# EAGLE board board (EAGLE 9.7.0)
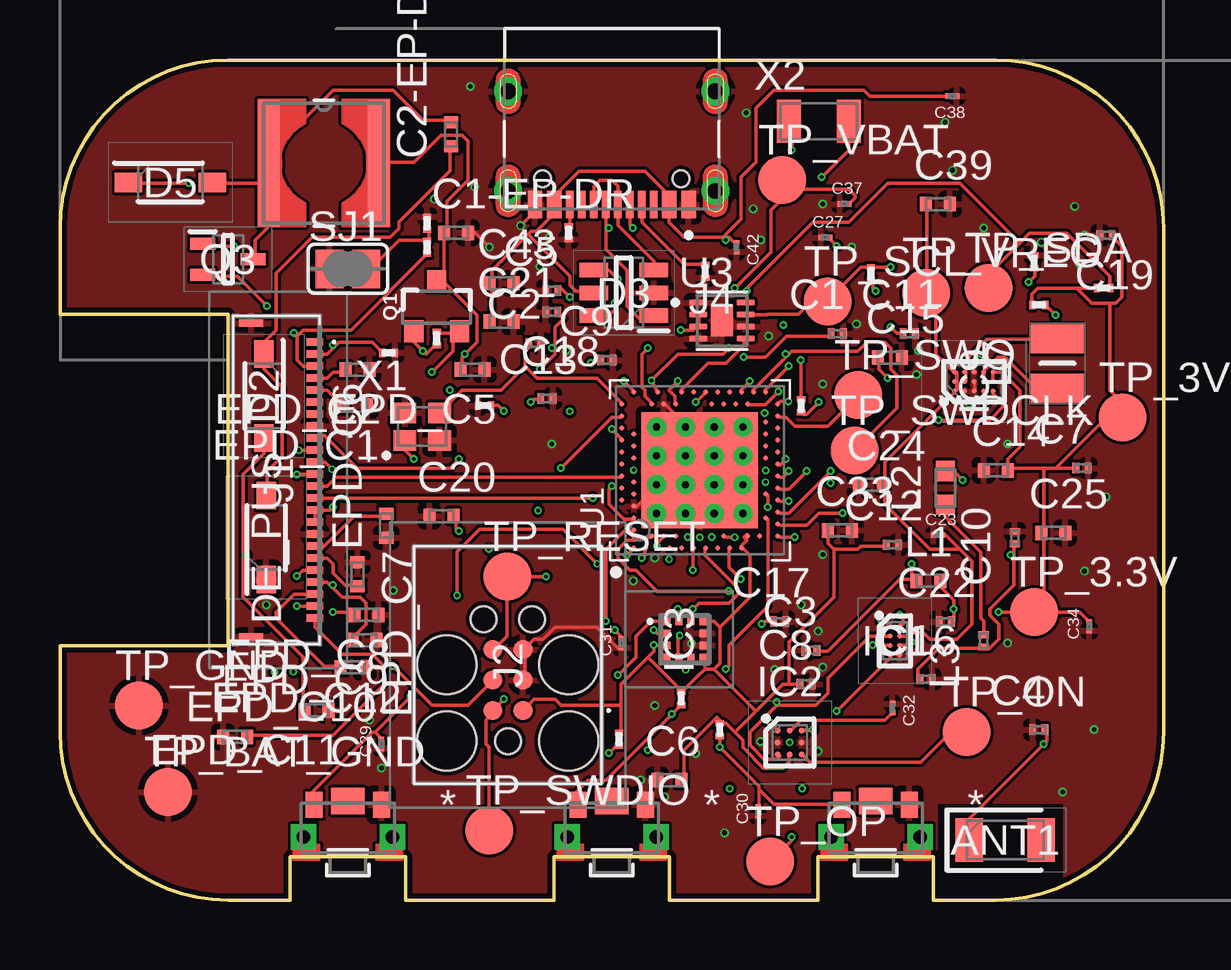
[diagram p0: board, top side]
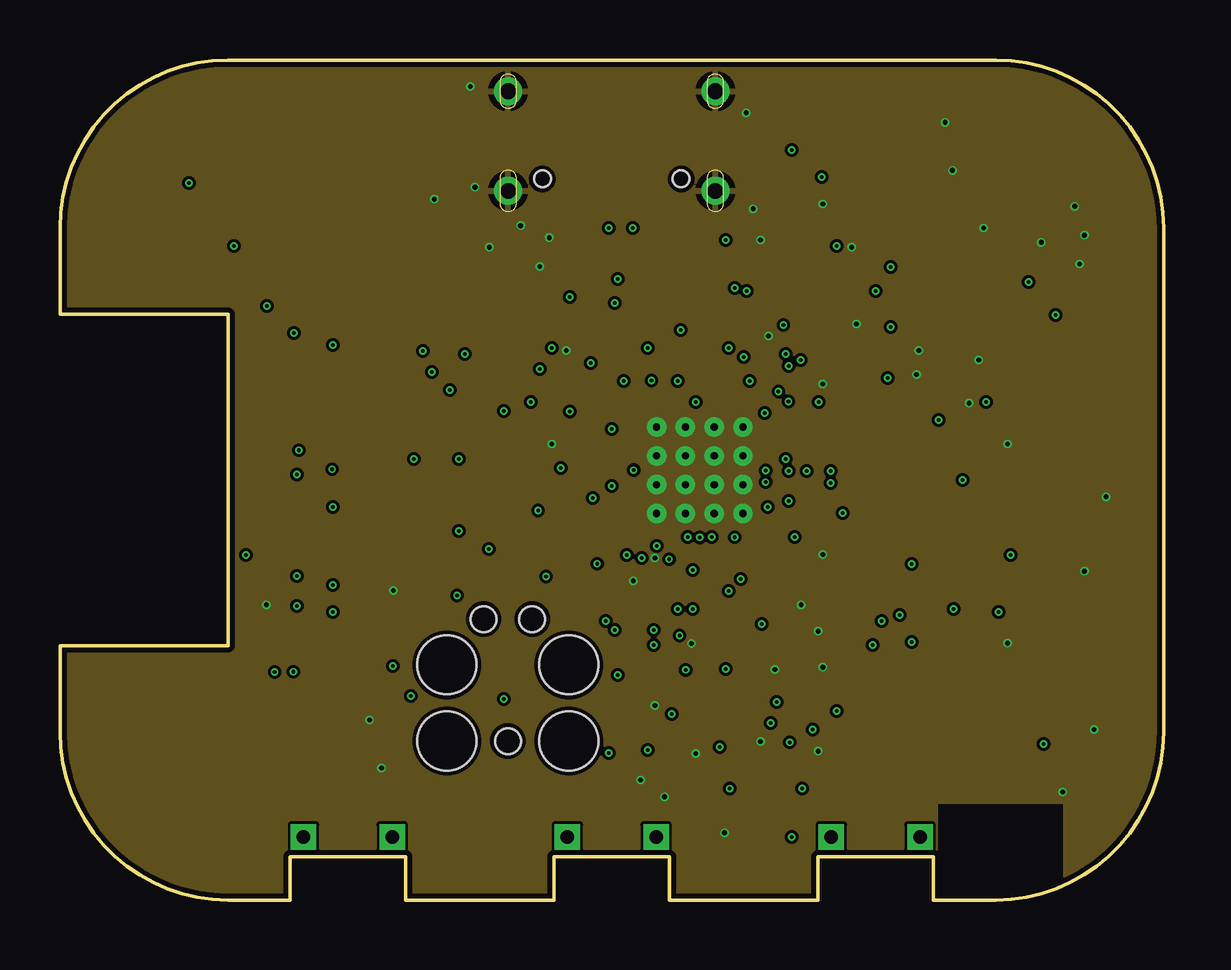
[diagram p1: board, inner layer Route2]
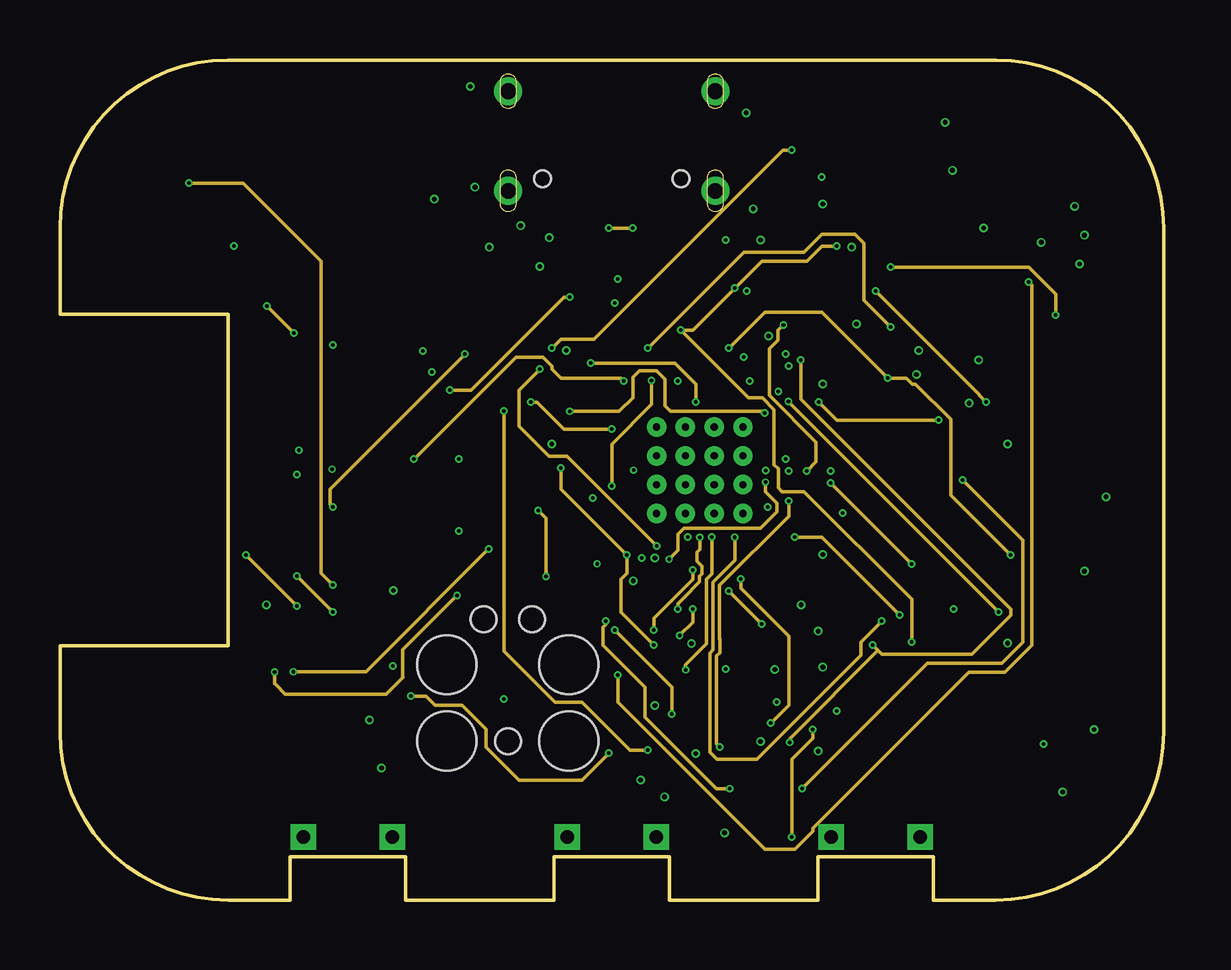
[diagram p2: board, inner layer Route15]
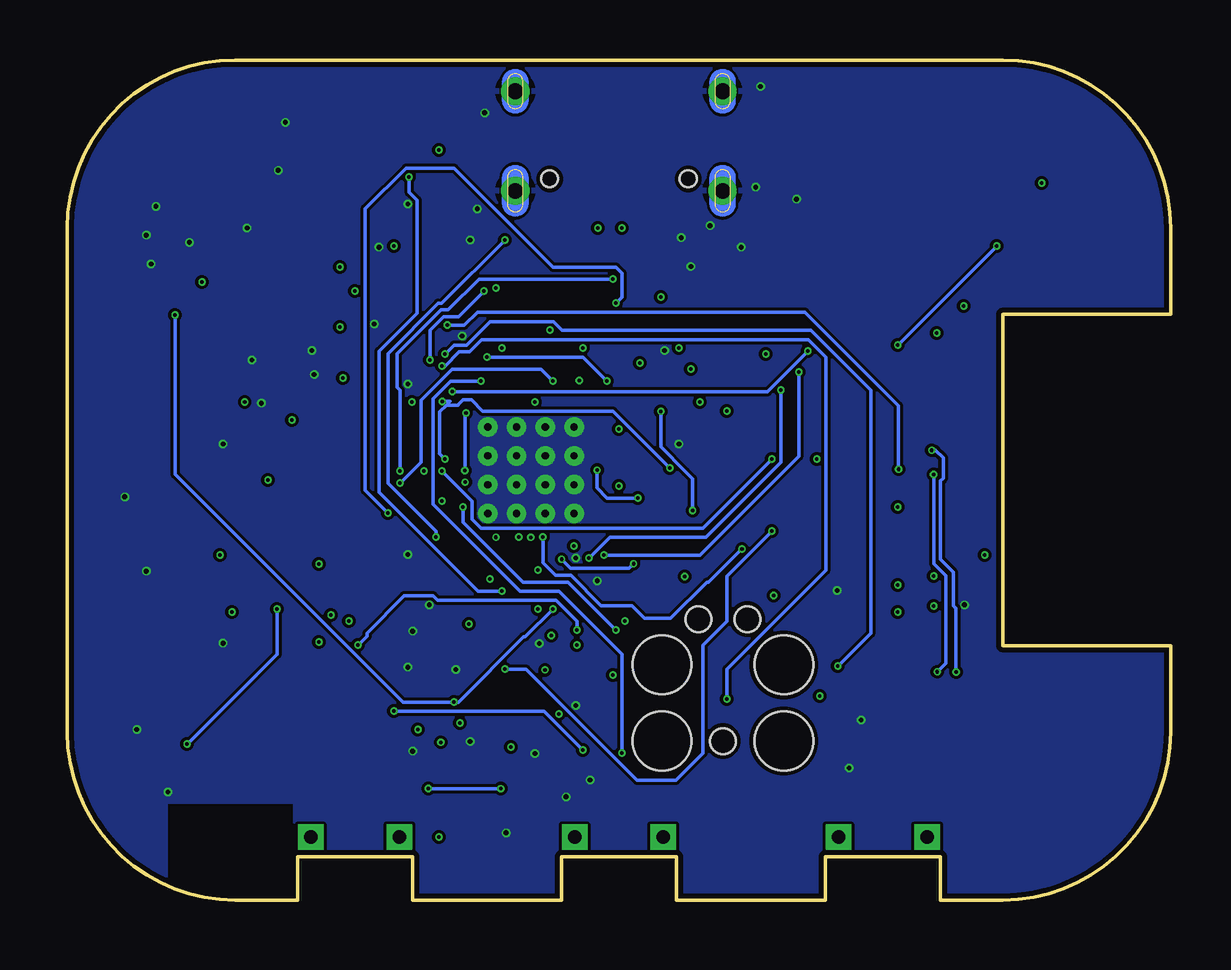
[diagram p3: board, bottom side, seen from below]

Size 46 x 35 mm. Coordinates in mm from the lower left corner, seen from the top.
Outline: 39,0 36.4,0 36.4,1.8 31.6,1.8 31.6,0 25.4,0 25.4,1.8 20.6,1.8 20.6,0 14.4,0 14.4,1.8 9.6,1.8 9.6,0 7,0 arc-90 0,7 0,10.6 7,10.6 7,24.4 0,24.4 0,28 arc-90 7,35 39,35 arc-90 46,28 46,7 arc-90 39,0
Copper layers ([2:1+2*15+16]): Top 0.035mm / dielectric 1.6mm / Route2 0.035mm / dielectric 0.15mm / Route15 0.035mm / dielectric 0.2mm / Bottom 0.035mm
Design rules "jlcpcb-2layers.dru *": minimum track width 5mil, minimum drill 0.15mm, track to track 5mil, track to pad 5mil, pad to pad 5mil, via to via 5mil, smd to smd 5mil, copper to edge 0.2mm, drill to drill 6mil, minimum pad ring 10mil, minimum via ring 3mil, stop-mask expansion 4mil, vias tented up to drill 0mil, thermal gap 10mil
Net classes: 0 default: width 0.15 mm; 1 HIGH_CURRENT: width 0.15 mm

## Footprints (pad centres in the part's own frame; a part is rotated, then mirrored left to right if it is on the bottom)
2450AT18B100E_ANTC3216X140N = smd 1.15 x 1.8: 1 -1.5,0; 2 1.5,0
NORDIC_NRF_3_RESC0201_L = smd 0.28 x 0.43: 1 -0.255,0; 2 0.255,0
NORDIC_NRF_3_RESC0402_L = smd 0.5 x 0.6: 1 -0.5,0; 2 0.5,0
GRM011R60J152KE01L_2_CAPC0201X13N = smd 0.22 x 0.23: 1 -0.185,0; 2 0.185,0
ESP32_C6_LIBRARY_5_SOD3716X135N = smd 1.15 x 0.8: 1 -1.75,0; 2 1.75,0
ESP32_C6_LIBRARY_3_SOT95P280X145-6N = smd 1.2 x 0.6: 1 -1.25,0.95; 2 -1.25,0; 3 -1.25,-0.95; 4 1.25,-0.95; 5 1.25,0; 6 1.25,0.95
BQ25180YBGR_BGA8C40P2X4_100X155X50 = smd 0.2 x 0.2: A1 -0.2,0.6; A2 0.2,0.6; B1 -0.2,0.2; B2 0.2,0.2; C1 -0.2,-0.2; C2 0.2,-0.2; D1 -0.2,-0.6; D2 0.2,-0.6
DRV2605YZFR_BGA9C50P3X3_144X144X62 = smd 0.25 x 0.25: A1 -0.5,0.5; A2 0,0.5; A3 0.5,0.5; B1 -0.5,0; B2 0,0; B3 0.5,0; C1 -0.5,-0.5; C2 0,-0.5; C3 0.5,-0.5
BMA423_BMA423 = smd 0.3 x 0.35: 1 -0.75,-0.775; 2 -0.25,-0.775; 3 0.25,-0.775; 4 0.75,-0.775; 7 0.75,0.775; 8 0.25,0.775; 9 -0.25,0.775; 10 -0.75,0.775 | smd 0.35 x 0.3: 5 0.775,-0.25; 6 0.775,0.25; 11 -0.775,0.25; 12 -0.775,-0.25
RT6160AWSC_BGA15C40P3X5_140X230X60 = smd 0.216 x 0.216: A1 -0.4,0.8; A2 0,0.8; A3 0.4,0.8; B1 -0.4,0.4; B2 0,0.4; B3 0.4,0.4; C1 -0.4,0; C2 0,0; C3 0.4,0; D1 -0.4,-0.4; D2 0,-0.4; D3 0.4,-0.4; E1 -0.4,-0.8; E2 0,-0.8; E3 0.4,-0.8
503480-2400_5034802400 = smd 0.3 x 0.7: 1 -5.75,1.525; 2 -5.25,1.525; 3 -4.75,1.525; 4 -4.25,1.525; 5 -3.75,1.525; 6 -3.25,1.525; 7 -2.75,1.525; 8 -2.25,1.525; 9 -1.75,1.525; 10 -1.25,1.525; 11 -0.75,1.525; 12 -0.25,1.525; 13 0.25,1.525; 14 0.75,1.525; 15 1.25,1.525; 16 1.75,1.525; 17 2.25,1.525; 18 2.75,1.525; 19 3.25,1.525; 20 3.75,1.525; 21 4.25,1.525; 22 4.75,1.525; 23 5.25,1.525; 24 5.75,1.525 | smd 0.3 x 1: MP1 -6.54,-1.125; MP2 6.54,-1.125
TC2030-IDC_TC2030IDC = smd 0.783 x 0.783: 1 -0.953,-0.635; 2 -0.953,0.635; 3 0.317,-0.635; 4 0.317,0.635; 5 1.588,-0.635; 6 1.588,0.635 | hole 2.451: -2.223,-2.54; -2.223,2.54; 0.952,-2.54; 0.952,2.54 | hole 1.067: -2.223,0; 2.857,-1.016; 2.857,1.016
KH-TYPE-C-16P_KINGHELM_KH-TYPE-C-16P = smd 0.6 x 1.15: A1_B12 -3.2,4.725; A4_B9 -2.4,4.725; A9_B4 2.4,4.725; A12_B1 3.2,4.725 | smd 0.3 x 1.15: A5 -1.25,4.725; A6 -0.25,4.725; A7 0.25,4.725; A8 1.25,4.725; B5 1.75,4.725; B6 0.75,4.725; B7 -0.75,4.725; B8 -1.75,4.725 | drill 0.65 pad 1.05: SH1 -4.32,0; SH2 4.32,0; SH3 -4.32,4.15; SH4 4.32,4.15 | hole 0.7: -2.89,3.65; 2.89,3.65
NORDIC_NRF_2_RESC0402_L = smd 0.5 x 0.6: 1 -0.5,0; 2 0.5,0
NORDIC_NRF_2_RESC0603_L = smd 0.85 x 0.8: 1 -0.7,0; 2 0.7,0
NORDIC_NRF_2_RESC0201_L = smd 0.28 x 0.43: 1 -0.255,0; 2 0.255,0
ESP32_C6_LIBRARY_2_IND_4828-WE-TPC_WRE = smd 0.9 x 5.3: 1 -2.286,0; 2 2.286,0
MLP2016SR47MT0S1_INDC2016X100N = smd 1.2 x 2.2: 1 -1.028,0; 2 1.028,0
ESP32_C6_LIBRARY_4_ESP32_C6_LIBRARY_4_ESP32_C6_LIBRARY_4_ESP32_C6_LIBRARY_4_ESP32_WROVER_SPARKFUN-DISCRETESEMI_SOT23-3 = smd 0.8 x 0.9: 1 -0.95,-1; 2 0.95,-1; 3 0,1.1
ESP32_C6_LIBRARY_6_SOT65P210X110-3N = smd 1.05 x 0.5: 1 -1.05,0.65; 2 -1.05,-0.65; 3 1.05,0
CPF0201D7K68C1_0201 = smd 0.35 x 0.25: 1 0,0.275; 2 0,-0.275
ESP32_C6_LIBRARY_7_JUMPER_SJ = smd 1.168 x 1.6: 1 -0.762,0; 2 0.762,0
2025-10-22_07-23-44_LIBRARY_SW_EVP-AKE31A_PAN = smd 0.711 x 1.092: 1 -1.4,-0.972; 2 1.4,-0.972 | drill 0.559 pad 0.914 square: 3 -1.848,0.381; 4 1.848,0.381 | smd 1.397 x 1.092: 5 0,-1.124
HECTOR_WATCH_1_TP20R = smd 2 x 2: TP 0,0
NORDIC_NRF_4_AQFN50P700X700X85_HS-74N = smd 4.85 x 4.85: P$74 0,0 | drill 0.3 pad 0.6: P$75 -1.8,1.8; P$76 -0.6,1.8; P$77 0.6,1.8; P$78 1.8,1.8; P$79 -1.8,0.6; P$80 -0.6,0.6; P$81 0.6,0.6; P$82 1.8,0.6; P$83 -1.8,-0.6; P$84 -0.6,-0.6; P$85 0.6,-0.6; P$86 1.8,-0.6; P$87 -1.8,-1.8; P$88 -0.6,-1.8; P$89 0.6,-1.8; P$90 1.8,-1.8 | smd 0.2 x 0.2: P$A8 -1.25,3.25; P$A10 -0.75,3.25; P$A12 -0.25,3.25; P$A14 0.25,3.25; P$A16 0.75,3.25; P$A18 1.25,3.25; P$A20 1.75,3.25; P$A22 2.25,3.25; P$A23 2.75,3.25; P$AA24 3.25,-2.25; P$AB2 -2.75,-2.5; P$AC5 -2,-2.75; P$AC9 -1,-2.75; P$AC11 -0.5,-2.75; P$AC13 0,-2.75; P$AC15 0.5,-2.75; P$AC17 1,-2.75; P$AC19 1.5,-2.75; P$AC21 2,-2.75; P$AC24 3.25,-2.75; P$AD2 -2.75,-3.25; P$AD4 -2.25,-3.25; P$AD6 -1.75,-3.25; P$AD8 -1.25,-3.25; P$AD10 -0.75,-3.25; P$AD12 -0.25,-3.25; P$AD14 0.25,-3.25; P$AD16 0.75,-3.25; P$AD18 1.25,-3.25; P$AD20 1.75,-3.25; P$AD22 2.25,-3.25; P$AD23 2.75,-3.25; P$B1 -3.25,2.75; P$B3 -2.5,2.75; P$B5 -2,2.75; P$B7 -1.5,2.75; P$B9 -1,2.75; P$B11 -0.5,2.75; P$B13 0,2.75; P$B15 0.5,2.75; P$B17 1,2.75; P$B19 1.5,2.75; P$B24 3.25,2.75; P$C1 -3.25,2.25; P$D2 -2.75,2; P$D23 2.75,2; P$E24 3.25,1.75; P$F2 -2.75,1.5; P$F23 2.75,1.5; P$G1 -3.25,1.25; P$H2 -2.75,1; P$H23 2.75,1; P$J1 -3.25,0.75; P$J24 3.25,0.75; P$K2 -2.75,0.5; P$L1 -3.25,0.25; P$L24 3.25,0.25; P$M2 -2.75,0; P$N1 -3.25,-0.25; P$N24 3.25,-0.25; P$P2 -2.75,-0.5; P$P23 2.75,-0.5; P$R1 -3.25,-0.75; P$R24 3.25,-0.75; P$T2 -2.75,-1; P$T23 2.75,-1; P$U1 -3.25,-1.25; P$U24 3.25,-1.25; P$V23 2.75,-1.5; P$W1 -3.25,-1.75; P$W24 3.25,-1.75; P$Y2 -2.75,-2; P$Y23 2.75,-2
ESP32_C6_LIBRARY_SON50P200X200X80-9N = smd 0.76 x 0.27: 1 -0.985,0.75; 2 -0.985,0.25; 3 -0.985,-0.25; 4 -0.985,-0.75; 5 0.985,-0.75; 6 0.985,-0.25; 7 0.985,0.25; 8 0.985,0.75 | smd 0.9 x 1.3: 9 0,0
NORDIC_NRF_BT-XTAL_2016_N = smd 0.95 x 0.85: 1 -0.725,-0.575; 2 0.725,-0.575; 3 0.725,0.575; 4 -0.725,0.575
NORDIC_NRF_1_XTAL_3215_N = smd 1 x 1.8: 1 -1.25,0; 2 1.25,0

## Placement (x,y rotation side)
ANT1  2450AT18B100E  [2450AT18B100E_ANTC3216X140N]  39.4,2.5 0 top
C1  12pF  [NORDIC_NRF_3_RESC0201_L]  32.4,23.6 0 top
C1-EP-DR  10uF  [NORDIC_NRF_3_RESC0402_L]  16.5,27.8 0 top
C2  12pF  [NORDIC_NRF_3_RESC0201_L]  19.8,23.2 0 top
C2-EP-DR  4.7uF/25V  [NORDIC_NRF_3_RESC0402_L]  16.3,31.9 90 top
C3  1pF  [NORDIC_NRF_3_RESC0201_L]  31.3,10.4 0 top
C4  1pF  [NORDIC_NRF_3_RESC0201_L]  40.8,7.1 0 top
C5  100nF  [NORDIC_NRF_3_RESC0201_L]  20.5,25.4 0 top
C6  4.7uF  [NORDIC_NRF_3_RESC0402_L]  25.4,5 0 top
C7  100nF  [NORDIC_NRF_3_RESC0201_L]  42.6,18 0 top
C8  100nF  [NORDIC_NRF_3_RESC0201_L]  31.1,9 0 top
C9  820pF  [NORDIC_NRF_3_RESC0201_L]  22.8,22.5 0 top
C10  N.C  [NORDIC_NRF_3_RESC0201_L]  39.8,15.1 90 top
C11  100pF  [NORDIC_NRF_3_RESC0201_L]  35.4,23.6 0 top
C12  100pF  [NORDIC_NRF_3_RESC0201_L]  34.7,14.8 0 top
C13  N.C  [NORDIC_NRF_3_RESC0201_L]  20.3,20.9 0 top
C14  4.7uF  [NORDIC_NRF_3_RESC0402_L]  39,17.9 0 top
C15  1.0uF  [NORDIC_NRF_3_RESC0402_L]  34.6,22.6 0 top
C16  47nF  [NORDIC_NRF_3_RESC0201_L]  36.1,9.2 0 top
C17  12pF  [NORDIC_NRF_3_RESC0201_L]  30,11.6 0 top
C18  12pF  [NORDIC_NRF_3_RESC0201_L]  20.5,24.5 180 top
C19  100nF  [NORDIC_NRF_3_RESC0201_L]  43.6,27.7 180 top
C20  4.7uF  [NORDIC_NRF_3_RESC0402_L]  15.9,16 0 top
C21  4.7uF  [NORDIC_NRF_3_RESC0402_L]  18.4,24.1 0 top
C22  N.C  [NORDIC_NRF_3_RESC0201_L]  36.9,11.6 0 top
C23  0.1uF  [GRM011R60J152KE01L_2_CAPC0201X13N]  36.6,15.2 0 top
C24  10uF  [NORDIC_NRF_3_RESC0402_L]  33.8,17.3 0 top
C25  22uF  [NORDIC_NRF_3_RESC0402_L]  41.4,15.3 0 top
C27  0.1uF  [GRM011R60J152KE01L_2_CAPC0201X13N]  31.9,27.6 0 top
C29  1uF  [GRM011R60J152KE01L_2_CAPC0201X13N]  13.4,6.5 90 top
C30  1uF  [GRM011R60J152KE01L_2_CAPC0201X13N]  29.1,3.7 90 top
C31  1uF  [GRM011R60J152KE01L_2_CAPC0201X13N]  23.4,10.7 90 top
C32  1uF  [GRM011R60J152KE01L_2_CAPC0201X13N]  34.7,8 270 top
C33  22uF  [NORDIC_NRF_3_RESC0402_L]  32.5,15.4 0 top
C34  0.1uF  [GRM011R60J152KE01L_2_CAPC0201X13N]  42.9,11.4 90 top
C37  1uF  [GRM011R60J152KE01L_2_CAPC0201X13N]  32.7,29 0 top
C38  1uF  [GRM011R60J152KE01L_2_CAPC0201X13N]  37.2,33.5 180 top
C39  10uF  [NORDIC_NRF_3_RESC0402_L]  36.6,29 0 top
C42  0.1uF  [GRM011R60J152KE01L_2_CAPC0201X13N]  28.2,27.2 270 top
C43  4.7uF  [NORDIC_NRF_3_RESC0402_L]  18.4,25.7 0 top
D2  MBR0530  [ESP32_C6_LIBRARY_5_SOD3716X135N]  8.5,21 270 top
D3  USBLC6-2SC6Y  [ESP32_C6_LIBRARY_3_SOT95P280X145-6N]  23.5,25.3 180 top
D5  MBR0530  [ESP32_C6_LIBRARY_5_SOD3716X135N]  4.6,29.9 0 top
DE_PUS  MBR0530  [ESP32_C6_LIBRARY_5_SOD3716X135N]  8.6,15.1 90 top
EPD_C1  1uF/50V  [NORDIC_NRF_3_RESC0402_L]  12.3,20.6 180 top
EPD_C2  1uF/50V  [NORDIC_NRF_3_RESC0402_L]  12.4,22.1 180 top
EPD_C5  0.1uF/50V  [NORDIC_NRF_3_RESC0402_L]  17.2,22.1 180 top
EPD_C6  1uF/50V  [NORDIC_NRF_3_RESC0402_L]  13.6,15.6 90 top
EPD_C7  1uF/50V  [NORDIC_NRF_3_RESC0402_L]  12.4,13.58 270 top
EPD_C8  1uF/50V  [NORDIC_NRF_3_RESC0402_L]  12.78,11.88 180 top
EPD_C9  1uF/50V  [NORDIC_NRF_3_RESC0402_L]  12.7,10.83 180 top
EPD_C10  1uF/50V  [NORDIC_NRF_3_RESC0402_L]  12.2,9.7 180 top
EPD_C11  1uF/50V  [NORDIC_NRF_3_RESC0402_L]  10.7,7.9 180 top
EPD_C12  1uF/50V  [NORDIC_NRF_3_RESC0402_L]  7.3,6.8 0 top
IC1  BQ25180YBGR  [BQ25180YBGR_BGA8C40P2X4_100X155X50]  34.8,10.8 0 top
IC2  DRV2605YZFR  [DRV2605YZFR_BGA9C50P3X3_144X144X62]  30.42,6.57 0 top
IC3  BMA421  [BMA423_BMA423]  26.05,10.86 270 top
IC9  RT6160AWSC  [RT6160AWSC_BGA15C40P3X5_140X230X60]  38.1,21.6 90 top
J1  503480-2400  [503480-2400_5034802400]  9.1,17.5 270 top
J2  TC2030-IDC  [TC2030-IDC_TC2030IDC]  18.67,8.85 90 top
J4  KH-TYPE-C-16P  [KH-TYPE-C-16P_KINGHELM_KH-TYPE-C-16P]  23,33.7 180 top
L1  3.9nH  [NORDIC_NRF_2_RESC0402_L]  36.2,13.3 0 top
L2  10uH  [NORDIC_NRF_2_RESC0603_L]  36.9,17.17 90 top
L3  15nH  [NORDIC_NRF_2_RESC0201_L]  38.5,10.8 90 top
L5  68uH  [ESP32_C6_LIBRARY_2_IND_4828-WE-TPC_WRE]  11,30.7 0 top
L7  FTC252012SR47MBCA  [MLP2016SR47MT0S1_INDC2016X100N]  41.58,22.36 270 top
Q1  20V/4.2A/52mΩ/1.4W  [ESP32_C6_LIBRARY_4_ESP32_C6_LIBRARY_4_ESP32_C6_LIBRARY_4_ESP32_C6_LIBRARY_4_ESP32_WROVER_SPARKFUN-DISCRETESEMI_SOT23-3]  15.7,24.7 0 top
Q3  SI1308EDL-T1-GE3  [ESP32_C6_LIBRARY_6_SOT65P210X110-3N]  7,26.7 0 top
R1_EP_DR  0.47  [CPF0201D7K68C1_0201]  15.3,27.2 0 top
R1_USB  5K1  [CPF0201D7K68C1_0201]  26.9,26.2 180 top
R2  0  [CPF0201D7K68C1_0201]  30.9,20.6 0 top
R2_EP_DR  10K  [CPF0201D7K68C1_0201]  13.7,22.8 270 top
R2_USB  5K1  [CPF0201D7K68C1_0201]  21.2,27.8 0 top
R3  0  [CPF0201D7K68C1_0201]  40.6,26.6 0 top
R4  0  [CPF0201D7K68C1_0201]  33.8,26.1 0 top
R5  10k  [CPF0201D7K68C1_0201]  27.5,7.1 180 top
R7  10k  [CPF0201D7K68C1_0201]  23.3,6.7 180 top
R8  10k  [CPF0201D7K68C1_0201]  25.9,8.4 180 top
R9  10K  [CPF0201D7K68C1_0201]  17.7,20.6 90 top
R17  3K3  [CPF0201D7K68C1_0201]  40.8,24.8 90 top
R18  3K3  [CPF0201D7K68C1_0201]  43.5,25.5 90 top
R_PWR_EPD  10K  [CPF0201D7K68C1_0201]  15.7,23.4 180 top
R_TYPE_SEL  2.2  [CPF0201D7K68C1_0201]  15.3,28.2 0 top
SJ1  0  [ESP32_C6_LIBRARY_7_JUMPER_SJ]  12,26.3 0 top
SW_DN  2025-10-22_07-23-44_LIBRARY_EVP-AKE31ASW_EVP-AKE31A_PAN  [2025-10-22_07-23-44_LIBRARY_SW_EVP-AKE31A_PAN]  12,3 180 top
SW_ENT  2025-10-22_07-23-44_LIBRARY_EVP-AKE31ASW_EVP-AKE31A_PAN  [2025-10-22_07-23-44_LIBRARY_SW_EVP-AKE31A_PAN]  23,3 180 top
SW_UP  2025-10-22_07-23-44_LIBRARY_EVP-AKE31ASW_EVP-AKE31A_PAN  [2025-10-22_07-23-44_LIBRARY_SW_EVP-AKE31A_PAN]  34,3 180 top
TP_3.3V  HECTOR_WATCH_1_TPTP20R  [HECTOR_WATCH_1_TP20R]  40.6,12 0 top
TP_3V3  HECTOR_WATCH_1_TPTP20R  [HECTOR_WATCH_1_TP20R]  44.3,20.1 0 top
TP_BAT_GND  HECTOR_WATCH_1_TPTP20R  [HECTOR_WATCH_1_TP20R]  4.5,4.5 0 top
TP_GND  HECTOR_WATCH_1_TPTP20R  [HECTOR_WATCH_1_TP20R]  3.3,8.1 0 top
TP_ON  HECTOR_WATCH_1_TPTP20R  [HECTOR_WATCH_1_TP20R]  37.8,7 0 top
TP_OP  HECTOR_WATCH_1_TPTP20R  [HECTOR_WATCH_1_TP20R]  29.6,1.6 0 top
TP_RESET  HECTOR_WATCH_1_TPTP20R  [HECTOR_WATCH_1_TP20R]  18.65,13.48 0 top
TP_SCL  HECTOR_WATCH_1_TPTP20R  [HECTOR_WATCH_1_TP20R]  32,24.94 0 top
TP_SDA  HECTOR_WATCH_1_TPTP20R  [HECTOR_WATCH_1_TP20R]  38.7,25.5 0 top
TP_SWDCLK  HECTOR_WATCH_1_TPTP20R  [HECTOR_WATCH_1_TP20R]  33.12,18.73 0 top
TP_SWDIO  HECTOR_WATCH_1_TPTP20R  [HECTOR_WATCH_1_TP20R]  17.9,2.9 0 top
TP_SWO  HECTOR_WATCH_1_TPTP20R  [HECTOR_WATCH_1_TP20R]  33.27,21.03 0 top
TP_VBAT  HECTOR_WATCH_1_TPTP20R  [HECTOR_WATCH_1_TP20R]  30.1,30 0 top
TP_VREG  HECTOR_WATCH_1_TPTP20R  [HECTOR_WATCH_1_TP20R]  36.1,25.3 0 top
U1  NRF52840_QF  [NORDIC_NRF_4_AQFN50P700X700X85_HS-74N]  26.67,17.91 90 top
U3  ESP32_C6_LIBRARY_MAX17048G+T10  [ESP32_C6_LIBRARY_SON50P200X200X80-9N]  27.59,24.14 0 top
X1  32MHz  [NORDIC_NRF_BT-XTAL_2016_N]  15.1,19.72 0 top
X2  32.768KHz  [NORDIC_NRF_1_XTAL_3215_N]  31.63,32.44 0 top

## Library data of the parts
ANT1 = InkTime_v5; ARROW_PART_NUMBER: 2450AT18B100E; ARROW_PRICE-STOCK: https://www.arrow.com/en/products/2450at18b100e/johanson-dielectrics?utm_currency=USD&region=nac; DESCRIPTION: Antennas 2.45GHz ANTENNA; HEIGHT: 1.4mm; MANUFACTURER_NAME: JOHANSON TECHNOLOGY; MANUFACTURER_PART_NUMBER: 2450AT18B100E; MOUSER_PART_NUMBER: 609-2450AT18B100E; MOUSER_PRICE-STOCK: https://www.mouser.co.uk/ProductDetail/Johanson-Technology/2450AT18B100E?qs=yCnrNFeXz%252Bh5MFsFIXGZGA%3D%3D
C1 C1-EP-DR C2 C2-EP-DR C3-C22 C24 C25 C33 C39 C43 EPD_C1 EPD_C2 EPD_C5-EPD_C12 L1-L3 R1_EP_DR R1_USB R2 R2_EP_DR R2_USB R3-R5 R7-R9 R17 R18 R_PWR_EPD R_TYPE_SEL SJ1 TP_3.3V TP_3V3 TP_BAT_GND TP_GND TP_ON TP_OP TP_RESET TP_SCL TP_SDA TP_SWDCLK TP_SWDIO TP_SWO TP_VBAT TP_VREG U1 X1 X2 = InkTime_v5
C23 C27 C29-C32 C34 C37 C38 C42 = InkTime_v5; AVAILABILITY: In Stock; CHECK_PRICES: https://www.snapeda.com/parts/GRM011R60J152KE01L/Murata/view-part/?ref=eda; DESCRIPTION: SMD Capacitor X5R(EIA) with Capacitance: 1500pF Tol. 10%. Rated Voltage: 6.3Vdc; MF: Murata; MP: GRM011R60J152KE01L; PACKAGE: 0201 Murata; PRICE: None; SNAPEDA_LINK: https://www.snapeda.com/parts/GRM011R60J152KE01L/Murata/view-part/?ref=snap
D2 D5 DE_PUS = InkTime_v5; AVAILABILITY: In Stock; CHECK_PRICES: https://www.snapeda.com/parts/MBR0530/Onsemi/view-part/?ref=eda; DESCRIPTION: Diode Schottky 30 V 500mA Surface Mount SOD-123; MF: ON Semiconductor; MP: MBR0530; PACKAGE: SOD-123-2 ON Semiconductor; PRICE: None; PURCHASE-URL: https://www.snapeda.com/api/url_track_click_mouser/?unipart_id=179458&manufacturer=ON Semiconductor&part_name=MBR0530&search_term=None; SNAPEDA_LINK: https://www.snapeda.com/parts/MBR0530/Onsemi/view-part/?ref=snap
D3 = InkTime_v5; AVAILABILITY: In Stock; CHECK_PRICES: https://www.snapeda.com/parts/USBLC6-2SC6Y/STMicroelectronics/view-part/?ref=eda; DESCRIPTION: 17V Clamp 5A (8/20µs) Ipp Tvs Diode Surface Mount SOT-23-6; MF: STMicroelectronics; MP: USBLC6-2SC6Y; PACKAGE: SOT-23-6 STMicroelectronics; PRICE: None; SNAPEDA_LINK: https://www.snapeda.com/parts/USBLC6-2SC6Y/STMicroelectronics/view-part/?ref=snap
IC1 = InkTime_v5; ARROW_PART_NUMBER: BQ25180YBGR; ARROW_PRICE-STOCK: https://www.arrow.com/en/products/bq25180ybgr/texas-instruments?utm_currency=USD&region=nac; DESCRIPTION: Charger IC Lithium Ion/Polymer, Lithium Iron Phosphate 8-DSBGA (1.6x1.1); HEIGHT: 0.5mm; MANUFACTURER_NAME: Texas Instruments; MANUFACTURER_PART_NUMBER: BQ25180YBGR; MOUSER_PART_NUMBER: 595-BQ25180YBGR; MOUSER_PRICE-STOCK: https://www.mouser.co.uk/ProductDetail/Texas-Instruments/BQ25180YBGR?qs=doiCPypUmgEWjAK%252BJAX6Tw%3D%3D
IC2 = InkTime_v5; ARROW_PART_NUMBER: DRV2605YZFR; ARROW_PRICE-STOCK: https://www.arrow.com/en/products/drv2605yzfr/texas-instruments?region=nac; DESCRIPTION: Haptic Driver for ERM/LRA with Built-In Library and Smart Loop Architecture; HEIGHT: 0.625mm; MANUFACTURER_NAME: Texas Instruments; MANUFACTURER_PART_NUMBER: DRV2605YZFR
IC3 = InkTime_v5; ARROW_PART_NUMBER: BMA423; ARROW_PRICE-STOCK: https://www.arrow.com/en/products/bma423/bosch; DESCRIPTION: Accelerometers Triaxial low-g 12bit Acceleration Sensor; HEIGHT: 1mm; MANUFACTURER_NAME: BOSCH; MANUFACTURER_PART_NUMBER: BMA423; MOUSER_PART_NUMBER: 262-BMA423; MOUSER_PRICE-STOCK: https://www.mouser.co.uk/ProductDetail/Bosch-Sensortec/BMA423?qs=HXFqYaX1Q2xC%252BSgeGoX3mg%3D%3D
IC9 = InkTime_v5; DESCRIPTION: Buck-Boost Regulator Positive Output Step-Up/Step-Down I2C DC-DC Controller IC 15-WL-CSP (BSC) (1.4x2.3); HEIGHT: 0.6mm; MANUFACTURER_NAME: RICHTEK; MANUFACTURER_PART_NUMBER: RT6160AWSC; MOUSER_PART_NUMBER: 835-RT6160AWSC; MOUSER_PRICE-STOCK: https://www.mouser.co.uk/ProductDetail/Richtek/RT6160AWSC?qs=amGC7iS6iy%2FLd9PSoixZXQ%3D%3D
J1 = InkTime_v5; DESCRIPTION: FFC & FPC Connectors 0.5mm FPC RA SMT Dual Contact 24Ckt; HEIGHT: 1.87mm; MANUFACTURER_NAME: Molex; MANUFACTURER_PART_NUMBER: 503480-2400; MOUSER_PART_NUMBER: 538-503480-2400; MOUSER_PRICE-STOCK: https://www.mouser.co.uk/ProductDetail/Molex/503480-2400?qs=OAhjpuo3Vu7efIoxFh9AOw%3D%3D
J2 = InkTime_v5; DESCRIPTION: CABLE ADAPTER 6 POS; HEIGHT: 19mm; MANUFACTURER_NAME: Tag Connect; MANUFACTURER_PART_NUMBER: TC2030-IDC
J4 = InkTime_v5; AVAILABILITY: Not in stock; CHECK_PRICES: https://www.snapeda.com/parts/KH-TYPE-C-16P/Kinghelm/view-part/?ref=eda; MF: kinghelm; MP: KH-TYPE-C-16P; PACKAGE: None; PRICE: None; SNAPEDA_LINK: https://www.snapeda.com/parts/KH-TYPE-C-16P/Kinghelm/view-part/?ref=snap
L5 = InkTime_v5; COPYRIGHT: Copyright (C) 2024 Ultra Librarian. All rights reserved.; MANUFACTURER_PART_NUMBER: 744043680; MFR_NAME: Wurth Electronics
L7 = InkTime_v5; DESCRIPTION: SMD / SMT Inductors (Coils), L=0.47?H, L x W x T :; HEIGHT: 1mm; JLCPCB: https://jlcpcb.com/partdetail/6763488-FTC252012SR47MBCA/C5832368; MANUFACTURER_NAME: TDK; MANUFACTURER_PART_NUMBER: FTC252012SR47MBCA
Q1 = InkTime_v5; PROD_ID: TRAN-14388
Q3 = InkTime_v5; AVAILABILITY: In Stock; CHECK_PRICES: https://www.snapeda.com/parts/SI1308EDL-T1-GE3/Vishay+Siliconix/view-part/?ref=eda; DESCRIPTION: Si1308EDL-T1-GE3 N-channel MOSFET Transistor, 1.5 A, 30 V, 3-Pin SC-70 | Siliconix / Vishay SI1308EDL-T1-GE3; MF: Vishay Siliconix; MP: SI1308EDL-T1-GE3; PACKAGE: SOT-323 Vishay Semiconductor; PRICE: None; PURCHASE-URL: https://www.snapeda.com/api/url_track_click_mouser/?unipart_id=274603&manufacturer=Vishay Siliconix&part_name=SI1308EDL-T1-GE3&search_term=None; SNAPEDA_LINK: https://www.snapeda.com/parts/SI1308EDL-T1-GE3/Vishay+Siliconix/view-part/?ref=snap
SW_DN SW_ENT SW_UP = InkTime_v5; COPYRIGHT: Copyright (C) 2025 Ultra Librarian. All rights reserved.; DIGI-KEY_PART_NUMBER_1: P123437TR-ND; DIGI-KEY_PART_NUMBER_2: P123437CT-ND; DIGI-KEY_PART_NUMBER_3: P123437DKR-ND; MANUFACTURER_NAME: Panasonic; MANUFACTURER_PART_NUMBER: EVP-AKE31A
U3 = InkTime_v5; AVAILABILITY: In Stock; CHECK_PRICES: https://www.snapeda.com/parts/MAX17048G+T10/Analog+Devices/view-part/?ref=eda; DESCRIPTION: 3µA 1-Cell/2-Cell Fuel Gauge with ModelGauge; MF: Analog Devices; MP: MAX17048G+T10; PACKAGE: TDFN-8 Maxim; PRICE: None; PURCHASE-URL: https://www.snapeda.com/api/url_track_click_mouser/?unipart_id=329239&manufacturer=Analog Devices&part_name=MAX17048G+T10&search_term=None; SNAPEDA_LINK: https://www.snapeda.com/parts/MAX17048G+T10/Analog+Devices/view-part/?ref=snap

## Nets
3V3 [HIGH_CURRENT]: C6.2 C7.1 C8.1 C12.1 C14.2 C19.1 C25.1 C33.1 C34.2 IC2.C2 IC3.3 IC3.7 IC3.10 IC9.E2 IC9.E3 J2.1 Q1.2 R5.2 R7.2 R8.2 R17.1 R18.1 R_PWR_EPD.2 TP_3.3V.TP TP_3V3.TP U1.P$A22 U1.P$AD14 U1.P$AD23 U1.P$B1 U1.P$W1 U1.P$Y2
ALERT: U1.P$J24 U3.5
D+: D3.4 U1.P$AD6
D-: D3.6 U1.P$AD4
DN: D3.1 J4.A7 J4.B7
DP: D3.3 J4.A6 J4.B6
EPD_3V3: C1-EP-DR.1 EPD_C5.2 J1.15 J1.16 L5.2 Q1.3
EPD_BUSY: J1.9 U1.P$AD12
EPD_CS: J1.12 U1.P$K2
EPD_DC: J1.11 U1.P$AD10
EPD_RST: J1.10 U1.P$AC11
GDR: J1.2 Q3.1 R2_EP_DR.2
GND: C1-EP-DR.2 C1.2 C2.2 C3.1 C4.1 C5.1 C6.1 C7.2 C8.2 C9.2 C10.2 C11.2 C12.2 C13.2 C14.1 C15.2 C16.2 C17.2 C18.2 C19.2 C20.1 C21.2 C22.1 C23.1 C24.1 C25.2 C27.1 C29.1 C30.1 C31.1 C32.1 C33.2 C34.1 C37.1 C38.1 C39.2 C42.2 C43.2 D3.2 DE_PUS.1 EPD_C1.1 EPD_C2.1 EPD_C5.1 EPD_C6.1 EPD_C7.1 EPD_C8.1 EPD_C9.1 EPD_C10.1 EPD_C11.1 EPD_C12.1 IC1.D2 IC2.B1 IC2.B3 IC3.8 IC3.9 IC9.B1 IC9.C1 IC9.C2 IC9.C3 J1.8 J1.17 J1.MP1 J1.MP2 J2.3 J2.5 J4.A1_B12 J4.A12_B1 J4.SH1 J4.SH2 J4.SH3 J4.SH4 R1_USB.1 R2_EP_DR.1 R2_USB.2 R3.1 R9.1 R_TYPE_SEL.1 SJ1.1 SW_DN.1 SW_ENT.1 SW_UP.1 TP_BAT_GND.TP TP_GND.TP U1.P$74 U1.P$75 U1.P$76 U1.P$77 U1.P$78 U1.P$79 U1.P$80 U1.P$81 U1.P$82 U1.P$83 U1.P$84 U1.P$85 U1.P$86 U1.P$87 U1.P$88 U1.P$89 U1.P$90 U1.P$B7 U1.P$F23 U3.1 U3.4 U3.6 U3.9 X1.2 X1.4
HAPTIC_EN: IC2.A1 U1.P$U1
IMU_INT1: IC3.5 U1.P$N1
IMU_INT2: IC3.6 U1.P$P2
LX1: IC9.B2 IC9.B3 L7.1
LX2: IC9.D2 IC9.D3 L7.2
MOSI: J1.14 U1.P$B13
N$1: IC1.D1 R9.2
N$2: C9.1 U1.P$N24
N$3: C3.2 L1.1 U1.P$H23
N$4: IC9.D1 R4.2
N$5: IC9.E1 R2.2
N$6: C20.2 U1.P$AC5
N$7: ANT1.1 C4.2 C22.2 L1.2
N$8: C1.1 U1.P$B24 X1.1
N$9: C2.1 U1.P$A23 X1.3
N$10: C11.1 U1.P$D23
N$11: C18.1 U1.P$F2 X2.1
N$12: R1_EP_DR.1 R_TYPE_SEL.2 SJ1.2
N$13: C13.1 U1.P$A18
N$14: L2.1 L3.2
N$15: L2.2 U1.P$B3
N$16: C32.2 IC2.A2
N$17: C10.1 C15.1 C16.1 L3.1 U1.P$B5 U1.P$E24
N$18: C17.1 U1.P$D2 X2.2
N$19: IC3.1 R3.2
N$20: C5.2 U1.P$C1
N$21: C2-EP-DR.1 D2.1 DE_PUS.2
N$24: C2-EP-DR.2 D5.2 L5.1 Q3.3
N$25: EPD_C2.2 J1.4
N$26: EPD_C1.2 J1.5
N$27: J4.B5 R2_USB.1
N$28: EPD_C7.2 J1.19
N$30: EPD_C12.2 J1.24
N$31: EPD_C6.2 J1.18
N$32: EPD_C8.2 J1.20
N$34: EPD_C10.2 J1.22
N$36: J4.A5 R1_USB.2
OUT+: IC2.A3 TP_OP.TP
OUT-: IC2.C3 TP_ON.TP
P0.04: U1.P$J1
P0.09: U1.P$L24
P0.13: C30.2 R5.1 SW_UP.2 U1.P$AD8
P0.14: C31.2 R8.1 SW_ENT.2 U1.P$AC9
P0.19: U1.P$AC15
P0.20: U1.P$AD16
P0.21: U1.P$AC17
P0.22: U1.P$AD18
P0.23: U1.P$AC19
P0.24: U1.P$AD20
P0.25: U1.P$AC21
P0.26: U1.P$G1
P0.27: U1.P$H2
P0.28: U1.P$B11
P0.29: U1.P$A10
P0.30: U1.P$B9
P0.31: U1.P$A8
P1.01: Q1.1 R_PWR_EPD.1 U1.P$Y23
P1.02: C29.2 R7.1 SW_DN.2 U1.P$W24
P1.03: U1.P$V23
P1.04: U1.P$U24
P1.05: U1.P$T23
P1.06: U1.P$R24
P1.07: U1.P$P23
P1.09: U1.P$R1
P1.10: U1.P$A20
P1.11: U1.P$B19
P1.12: U1.P$B17
P1.13: U1.P$A16
P1.14: U1.P$B15
P1.15: U1.P$A14
PMIC_INT: IC1.A1 U1.P$T2
PREVGH: D5.1 EPD_C9.2 J1.21
PREVGL: D2.2 EPD_C11.2 J1.23
RESE: J1.3 Q3.2 R1_EP_DR.2
RESET: J2.6 TP_RESET.TP U1.P$AC13
SCK: J1.13 U1.P$A12
SCL: IC1.B1 IC2.C1 IC3.12 R4.1 R17.2 TP_SCL.TP U1.P$M2 U3.7
SDA: IC1.C1 IC2.B2 IC3.2 R2.1 R18.2 TP_SDA.TP U1.P$L1 U3.8
SWDCLK: J2.4 TP_SWDCLK.TP U1.P$AA24
SWDIO: J2.2 TP_SWDIO.TP U1.P$AC24
SWO: TP_SWO.TP U1.P$AD22
VBAT [HIGH_CURRENT]: C27.2 C37.2 IC1.C2 TP_VBAT.TP U3.2 U3.3
VBUS [HIGH_CURRENT]: C21.1 C38.2 C42.1 C43.1 D3.5 IC1.A2 J4.A4_B9 J4.A9_B4 U1.P$AD2
VREG: C23.2 C24.2 C39.1 IC1.B2 IC9.A1 IC9.A2 IC9.A3 TP_VREG.TP

## Tracks (layer width: path | path; a pad name or v marks a point on that pad's centre or on a via)
3V3  (via drill 0.15)
  Top 0.15: R18.1 42.38,25.5 | 42.38,25.5 40.75,25.5 40.5,25.25 40.5,24.88 R17.1 | 43.75,24.88 43,24.88 42.38,25.5 | 43.75,24.88 44,24.88 44.25,25.12 44.25,27.25 43.88,27.62 C19.1 | 41,12 42.5,12 42.88,11.62 C34.2 | IC9.E2 38.88,21.62 38.88,22 IC9.E3 39.25,22 40,21.25 40,18.88 39.5,18.38 39.5,18 | 39.5,18 41,18 | 41,18 41.5,18 | 41.5,18 C7.1 | 39.5,18 C14.2 | 41,18 41,15.38 C25.1 41,15.25 41,12 | 41.5,18 43.5,20 44.25,20 TP_3V3.TP 44.25,20.12 44.25,20.75 43.75,21.25 43.75,24.88 | 41,12 TP_3.3V.TP v39.12,12 | U1.P$Y2 28.62,15.25 28.5,15.12 28.62,15 28.38,14.75 U1.P$W1 28.5,14.62 28.75,14.38 28.75,12.62 27.5,11.38 | 26.88,9.62 26.88,10 IC3.7 | 27.5,11.38 27.25,11.62 26.88,11.62 IC3.10 | 27.5,11.38 27.5,9.88 27.25,9.62 | 26.88,9.62 27.25,9.62 | 32.25,14.62 33.25,14.62 33.38,14.75 34.38,14.75 C12.1 | 32.25,14.62 32,14.88 C33.1 | 28.12,7 27.75,7.38 27.62,7.38 | IC2.C2 30.38,6 30.38,5.75 30.12,5.5 29.33,5.5 28.47,6.36 28.47,6.65 28.12,7 | 30.38,9 30.12,9 29,7.88 | 30.38,9 C8.1 | 28.12,7 29,7.88 | 27.62,7.38 27.38,7.62 26,6.25 26,5 C6.2 | 27.62,7.38 R5.2 | 32.25,14.62 32.25,12.62 30.38,10.75 30.38,9 | 29,7.88 27.25,9.62 | 16.38,23.62 16.62,23.62 Q1.2 16.38,23.62 | 16.38,23.62 15.75,23.62 R_PWR_EPD.2 | v23.62,14.38 23.88,14.62 U1.P$B1 | IC3.3 25.25,10.62 v24.75,10.62 24.75,10.38 24.5,10.12 | v20.88,18 23,20.12 23.38,20.12 U1.P$A22 | v30.25,18.38 30,18.12 U1.P$AD14 | v30.37,20.77 30.04,20.77 U1.P$AD23 | 23.38,8.12 23.38,9 24.5,10.12 | 23.38,8.12 23.38,7 R7.2 | 23.38,8.12 20.88,8.12 20.62,8.38 19.75,8.38 19.38,8 J2.1 | 16.38,23.62 16.38,22.88 v15.5,22 | 24.5,10.12 25.88,8.75 R8.2 25.93,8.68 26.6,9.34 26.6,9.35 26.88,9.62
  Route15 0.15: v24.75,10.62 23.38,12 23.38,13.38 23.62,13.62 v23.62,14.38 20.88,17.12 v20.88,18 | v39.12,12 v30.37,20.76 v30.37,20.77
  Bottom 0.15: v20.88,18 23.25,20.38 28.68,20.38 29.14,20.84 29.38,20.84 29.5,20.84 29.66,20.68 29.71,20.62 30.18,20.62 | v15.5,22 15.5,18.5 19.62,14.38 v23.62,14.38 | v30.37,20.77 30.03,20.77 30.18,20.62 | 30.18,20.62 30.47,20.34 30.47,19.53 30.47,18.59 v30.25,18.38
ALERT
  Top 0.15: U1.P$J24 25.88,21.25 27,22.38 27.75,22.38 28.5,23.12 28.5,23.38 U3.5
D+  (via drill 0.15)
  Top 0.15: v32.12,17.88 30.38,16.12 30,16.12 U1.P$AD6 | v23.25,25.88 22.88,26.25 D3.4
  Bottom 0.15: v32.12,17.88 32.12,21.25 32.25,21.38 32.25,22.75 30.42,24.59 30.12,24.59 28.83,25.88 v23.25,25.88
D-  (via drill 0.15)
  Top 0.15: v32.62,16.12 31.62,16.12 31.12,15.62 30,15.62 U1.P$AD4 | v23.12,24.88 23.12,24.62 22.88,24.38 22.25,24.38 D3.6
  Bottom 0.15: v23.12,24.88 22.88,25.12 22.88,26.12 23.12,26.38 25.75,26.38 29.88,30.5 31.88,30.5 33.58,28.8 33.58,17.08 v32.62,16.12
DN  (via drill 0.15)
  Top 0.15: 22.75,28 22.75,27.12 23.62,26.25 23.62,24.75 24.12,24.25 24.75,24.25 D3.1 | 22.75,28 J4.A7 | J4.B7 23.75,28.12 v23.88,28 | 22.75,28 v22.88,28
  Route15 0.15: v22.88,28 v23.88,28
DP
  Top 0.15: J4.B6 22.25,29.75 22.5,30 23,30 23.25,29.75 J4.A6 23.25,28.12 24.75,26.62 D3.3
EPD_3V3  (via drill 0.15)
  Top 0.15: J1.16 J1.15 11.25,16.25 v11.38,16.38 | 16,25.75 17.38,24.38 17.38,23.25 v16.88,22.75 16.75,22.62 16.75,22.12 EPD_C5.2 | 16,25.75 15.75,25.75 Q1.3 16,25.75 | 16,25.75 C1-EP-DR.1 16,27.88 16.12,28 16.12,29.12 17,30 17,31.62 16.75,31.88 15.88,31.88 14.75,30.75 13.38,30.75 L5.2
  Route15 0.15: v11.38,16.38 11.25,16.5 11.25,17.12 v16.88,22.75
EPD_BUSY  (via drill 0.15)
  Top 0.15: v30.38,17.88 30.12,17.62 30,17.62 U1.P$AD12 | v16.62,18.38 16.25,18 12.38,18 11,19.38 10.75,19.38 J1.9
  Bottom 0.15: v30.38,17.88 29.12,16.62 29.12,15.88 28.75,15.5 19.5,15.5 v16.62,18.38
EPD_CS  (via drill 0.15)
  Top 0.15: J1.12 10.61,17.73 v9.88,17.73 | U1.P$K2 v26.17,15.12
  Route15 0.15: v17.87,14.63 12.75,9.51 v9.73,9.51
  Bottom 0.15: v26.17,15.12 26.17,14.06 25.75,13.64 25.64,13.53 25.33,13.53 25,13.53 23.74,12.27 23.74,12.26 22.46,12.26 22.09,11.89 21.93,11.73 20.85,11.73 19.34,13.24 19.26,13.24 v17.87,14.63 | v9.88,17.73 9.88,14.02 9.37,13.51 9.37,9.87 v9.73,9.51
EPD_DC  (via drill 0.15)
  Top 0.15: v31.12,17.88 30.38,17.12 30,17.12 U1.P$AD10 | v11.35,17.95 11.04,18.25 J1.11
  Route15 0.15: v31.12,17.88 31.52,18.27 31.52,19.07 29.57,21.02 29.57,22.96 29.94,23.33 29.94,23.74 v30.16,23.95
  Bottom 0.15: v11.35,17.95 11.35,20.59 15.25,24.5 28.9,24.5 29.45,23.95 v30.16,23.95
EPD_RST  (via drill 0.15)
  Top 0.152: U1.P$AC11 v29.41,17.41 | v22.39,14.01 20.96,15.44 17.48,15.44 16.56,14.52 v16.56,12.7 v16.55,12.69 | J1.10 v9.96,18.74
  Route15 0.152: v29.41,17.41 29.41,17.01 29.84,16.58 29.88,16.54 29.88,16.18 29.2,15.5 28.01,15.5 26.01,15.5 25.76,15.25 25.76,14.57 v25.39,14.2 | v16.55,12.69 14.29,10.43 14.29,9.3 14.3,9.29 13.59,8.57 9.39,8.57 9.01,8.96 8.95,9.02 v8.95,9.5
  Bottom 0.152: v25.39,14.2 25.01,13.82 22.89,13.82 22.58,13.82 v22.39,14.01 | v8.95,9.5 8.95,12.15 9.06,12.26 9.06,13.65 9.6,14.19 9.6,17.46 9.48,17.58 9.48,18.42 9.8,18.74 v9.96,18.74
GDR  (via drill 0.15)
  Top 0.15: 11.5,23.12 11.12,22.75 J1.2 | 11.5,23.12 11.62,23.25 13,23.25 13.38,22.88 R2_EP_DR.2 | v7.25,27.25 6,27.25 Q3.1 | 11.5,23.12 v11.38,23.12
  Bottom 0.15: v11.38,23.12 v7.25,27.25
GND  (via drill 0.2)
  Top 0.15: J2.3 19.38,9.25 19.38,10.38 J2.5 19.38,10.5 19.75,10.88 20.12,10.88 20.62,11.38 22.38,11.38 23.25,10.5 23.38,10.5 C31.1 | IC9.C2 38.12,21.5 38.12,21.25 IC9.C1 | U1.P$B7 24,16.38 24.88,17.25 U1.P$74 26.12,19.75 | 26.12,19.75 25.25,20.62 U1.P$F23 | 26.12,19.75 U1.P$82
  Top 0.152: J4.A12_B1 19.8,28.7 v19.2,28.1 | C1-EP-DR.2 17.3,27.8 v17.9,27.2
  other vias: 8.6,12.3 13.9,12.9 20,26.4 29.2,27.5 28.9,28.8 33,27.2 31.8,29 38.5,28 42.3,28.9 42.5,26.5 39.5,19 43.6,16.8 42.7,13.7 39.5,10.7 43.1,7.1 41.8,4.5 29.8,9.6 31.8,14.4 24.8,14.25 24.8,8.1 26.5,6.1 27.7,2.8 31.8,21.5 20.5,19 21.1,22.9 12.9,7.5 23.9,13.3 37.2,30.4 28.6,32.8 17.1,33.9 17.3,29.7 26.32,10.68 33.2,24 35.8,22.9 37.9,20.7 35.7,21.9 42.7,27.7 40.9,27.4 36.9,32.4 15.6,29.2 20.4,27.6 13.4,5.5 30.9,12.3 31.6,11.2 31.8,9.7 29.2,6.6 31.6,6.2 38.3,22.5 29.53,23.5 25.2,4.3 24.2,5
  pour Route2: 41.86,4.04 41.88,4.02 41.88,-0.52 46.92,-0.52 46.92,35.92 -0.62,35.92 -0.62,-1.22 36.52,-1.22 36.52,4.02 36.54,4.04 36.56,4.06 36.58,4.08 41.82,4.08 41.84,4.06
  pour Top: 41.86,4.04 41.88,4.02 41.88,-0.52 46.92,-0.52 46.92,35.92 -0.62,35.92 -0.62,-1.22 36.52,-1.22 36.52,4.02 36.54,4.04 36.56,4.06 36.58,4.08 41.82,4.08 41.84,4.06
  pour Bottom: 41.86,4.04 41.88,4.02 41.88,-0.52 46.92,-0.52 46.92,35.92 -0.62,35.92 -0.62,-1.22 36.52,-1.22 36.52,4.02 36.54,4.04 36.56,4.06 36.58,4.08 41.82,4.08 41.84,4.06
HAPTIC_EN  (via drill 0.15)
  Top 0.15: v28.38,13.38 27.88,13.88 27.88,14.62 U1.P$U1 | v29.62,7.38 29.88,7.12 IC2.A1
  Route15 0.15: v28.38,13.38 28.38,13 30.38,11 30.38,8.12 v29.62,7.38
IMU_INT1  (via drill 0.15)
  Top 0.15: v26.38,12.12 26.62,12.38 27.88,12.38 28.25,12.75 28.25,13 26.88,14.38 26.88,14.62 U1.P$N1 | v25.82,11.03 25.75,10.95 25.75,10.12 IC3.5
  Route15 0.15: v26.38,12.12 26.38,11.57 v25.82,11.03
IMU_INT2  (via drill 0.15)
  Top 0.152: v27.17,15.12 U1.P$P2 | IC3.6 26.3,9.81 v26.08,9.59
  Route15 0.152: v27.17,15.12 27.17,13.59 27,13.42 26.94,13.36 26.94,11.7 26.94,10.67 26.87,10.6 26.08,9.81 v26.08,9.59
LX1
  Top 0.15: 37.75,22 37.75,21.62 IC9.B2 | 37.75,22 IC9.B3 | L7.1 41.5,23.38 38.64,23.38 37.75,22.48 37.75,22
LX2
  Top 0.15: IC9.D2 IC9.D3 38.5,22.04 39.09,22.62 39.38,22.62 40.62,21.38 41.5,21.38 L7.2
MOSI  (via drill 0.15)
  Top 0.15: U1.P$B13 v23.91,17.91 | J1.14 v22.21,16.75
  Bottom 0.15: v22.21,16.75 23.5,16.75 23.92,17.17 U1.P$B13 v23.91,17.91
N$1  (via drill 0.15)
  Top 0.15: v32.38,7.88 34.62,10.12 IC1.D1 | v18.5,20.38 18.25,20.62 18,20.62 R9.2
  Route15 0.15: v24.5,6.25 23.75,6.25 21.75,8.25 20.62,8.25 18.5,10.38 v18.5,20.38
  Bottom 0.15: v32.38,7.88 26.12,7.88 v24.5,6.25
N$2  (via drill 0.15)
  Top 0.15: v26.5,20.75 26.88,21.12 U1.P$N24 | v22.12,22.38 22.25,22.5 C9.1
  Route15 0.15: v26.5,20.75 26.5,21.5 25.62,22.38 v22.12,22.38
N$3  (via drill 0.15)
  Top 0.15: v25.75,21.62 25.38,21.25 25.62,21 25.62,20.75 U1.P$H23 | 35.5,13.38 v35.5,14 | 35.5,13.38 35,13.38 32,10.38 31.62,10.38 C3.2 | 35.5,13.38 L1.1
  Route15 0.15: v35.5,14 v32.12,17.38
  Bottom 0.15: v25.75,21.62 26.25,22.12 29.95,22.12 31.25,20.83 31.25,18.25 v32.12,17.38
N$4  (via drill 0.15)
  Top 0.15: v34,25.38 33.88,25.5 33.88,25.75 R4.2 | IC9.D1 38.5,20.85 v38.6,20.75
  Route15 0.15: v34,25.38 38.33,21.05 38.33,21.03 v38.6,20.75
N$5  (via drill 0.15)
  Top 0.15: v31.62,20.75 31.12,20.25 31,20.25 R2.2 | IC9.E1 38.88,21.12 39.3,20.7 39.3,20.55 38.75,20 v36.62,20
  Route15 0.15: v36.62,20 32.38,20 v31.62,20.75
N$6  (via drill 0.15)
  Top 0.15: v27.75,9.62 27.88,9.75 27.88,10.62 29.5,12.25 29.5,15.88 U1.P$AC5 | v16.62,15.38 16.5,15.5 16.5,16 C20.2
  Bottom 0.15: v27.75,9.62 26.88,9.62 22.25,5 20.62,5 19.5,6.12 19.5,10.62 18.5,11.62 18.5,13.5 v16.62,15.38
N$7  (via drill 0.15)
  Top 0.15: C22.2 37.25,11.62 v37.25,12.12 37.25,12.5 36.75,13 36.75,13.25 L1.2 | C4.2 41.12,7 41.12,6.62 v41,6.5 37.88,3.38 37.88,2.5 ANT1.1
  Bottom 0.15: v37.25,12.12 37.25,10.25 v41,6.5
N$8  (via drill 0.15)
  Top 0.15: v23.5,21.62 23.88,21.25 U1.P$B24 | v14.75,18.38 14.38,18.75 X1.1 | C1.1 32.12,23.5 30.27,23.5 29.4,22.62 v28.5,22.62
  Route15 0.15: v23.5,21.62 23.38,21.75 20.88,21.75 20.5,22.12 20.5,22.25 20.12,22.62 19,22.62 v14.75,18.38
  Bottom 0.15: v28.5,22.62 24.5,22.62 v23.5,21.62
N$9
  Top 0.15: 19.38,22.25 19.88,21.75 22.38,21.75 23.38,20.75 U1.P$A23 | 19.38,22.25 19.38,22.88 19.62,23.12 C2.1 | 19.38,22.25 18.38,21.25 16.75,21.25 15.88,20.38 X1.3
N$10  (via drill 0.15)
  Top 0.15: v24.5,23 24.25,22.75 24.25,21.38 24.38,21.25 24.38,21 24.62,20.75 U1.P$D23 | v34.62,23.88 34.88,23.62 35.12,23.62 C11.1
  Route15 0.15: v24.5,23 28.5,27 31,27 31.75,27.75 33.12,27.75 33.5,27.38 33.5,25 v34.62,23.88
N$11  (via drill 0.15)
  Top 0.15: v24.88,14.75 24.88,14.88 25.12,15.12 U1.P$F2 | v20,22.12 20.62,22.75 20.62,23 | 20.62,23 20.62,23.88 21,24.25 C18.1 | v30.5,31.25 30.5,32.38 X2.1 | 20.62,23 v20.5,23
  Route15 0.15: v24.88,14.75 21.12,18.5 20.38,18.5 19.12,19.75 19.12,21.25 v20,22.12 | v30.5,31.25 30.12,31.25 22.25,23.38 20.88,23.38 v20.5,23
N$12
  Top 0.15: R_TYPE_SEL.2 15.38,27.88 15.38,27.5 R1_EP_DR.1 15.25,27.5 14.12,27.5 12.88,26.25 SJ1.2
N$13  (via drill 0.15)
  Top 0.15: v23,19.62 23.38,19.25 U1.P$A18 | v19.62,20.75 19.75,20.88 20,20.88 C13.1
  Route15 0.15: v23,19.62 21,19.62 19.88,20.75 v19.62,20.75
N$14
  Top 0.15: L3.2 38.5,11.62 38.38,11.75 38.38,14.5 36.88,16 36.88,16.38 L2.1
N$15  (via drill 0.15)
  Top 0.15: v22.75,11.62 22.75,14.62 23.5,15.38 23.88,15.38 U1.P$B3 | v37.62,17.5 37.25,17.88 37,17.88 L2.2
  Route15 0.15: v22.75,11.62 22.75,11.5 22.62,11.38 22.62,10.62 24.38,8.88 24.38,7.62 27.36,4.64 v27.92,4.64 | v37.62,17.5 40.12,15 40.12,10.75 39.25,9.88 36.16,9.88 v30.94,4.65 | v30.94,4.65
  Bottom 0.15: v27.92,4.64 v30.93,4.64 v30.94,4.65
N$16
  Top 0.15: C32.2 34.62,7.75 34.38,7.5 30.88,7.5 30.5,7.12 IC2.A2
N$17  (via drill 0.15)
  Top 0.15: v23,17.25 22.88,17.12 22.88,16.5 23.5,15.88 23.88,15.88 U1.P$B5 | U1.P$E24 24.88,21.19 24.68,21.62 v24.66,21.65 25.75,22.75 27.62,22.75 v27.88,23 | 38.5,10.5 36.62,10.5 35.75,9.62 35.75,9.25 C16.1 | 39.75,14.38 39.75,13.12 38.75,12.12 38.75,11.88 39.12,11.5 39.12,10.88 38.75,10.5 38.5,10.5 | 39.75,14.38 39.75,14.75 C10.1 | 38.5,10.5 L3.1 | v34.5,21.75 34.12,22.12 34.12,22.5 C15.1 | 39.75,14.38 v39.62,14.38
  Route15 0.15: v23,17.25 23,19 24.66,20.66 v24.66,21.65 | v39.62,14.38 37.12,16.88 37.12,20.03 35.66,21.5 35.53,21.5 35.28,21.75 v34.5,21.75 31.75,24.5 29.38,24.5 v27.88,23
N$18  (via drill 0.15)
  Top 0.15: v27.88,12.88 24.88,12.88 24,13.75 23.75,13.75 23.25,14.25 23.25,14.62 23.62,15 24,15 24.12,15.12 24.62,15.12 U1.P$D2 | v29.25,11.5 29.38,11.62 29.62,11.62 C17.1 | v31.75,30.12 32.88,31.25 32.88,32.38 X2.2
  Route15 0.15: v29.25,11.5 v27.88,12.88
  Bottom 0.15: v27.88,12.88 28.88,12.88 33,17 33,22.88 31.42,24.45 31.42,29.16 31.75,29.48 v31.75,30.12
N$19  (via drill 0.15)
  Top 0.15: v23.25,9.38 24,10.12 24,11 24.62,11.62 25.25,11.62 IC3.1 | v40.38,25.75 40.62,26 40.62,26.25 R3.2
  Route15 0.15: v23.25,9.38 23.25,8.25 29.38,2.12 30.62,2.12 31.38,2.88 31.38,3 37.88,9.5 39.38,9.5 40.5,10.62 40.5,25.62 v40.38,25.75
N$20  (via drill 0.15)
  Top 0.15: v24.25,14.25 24.38,14.38 24.38,14.62 U1.P$C1 | v21.25,25.12 20.88,25.5 C5.2
  Route15 0.15: v16.25,21.25 17.12,21.25 21,25.12 v21.25,25.12
  Bottom 0.15: v24.25,14.25 23.38,15.12 19.38,15.12 16.25,18.25 v16.25,21.25
N$21
  Top 0.15: C2-EP-DR.1 16.25,31.38 16.25,30.38 14.12,28.26 14.12,28 13.75,27.62 10.5,27.62 9,26.12 9,23.75 8.5,23.25 D2.1 8.5,22.12 9.25,21.38 9.25,18.5 8.62,17.88 8.62,16.88 DE_PUS.2
N$24
  Top 0.15: C2-EP-DR.2 16.25,32.5 15.12,32.5 13.88,33.75 11.38,33.75 8.75,31.12 8.75,30.75 L5.1 | 8.62,29.88 8.62,30.62 L5.1 | 8.62,29.88 8.62,28 8.12,27.5 8.12,26.75 Q3.3 | 8.62,29.88 6.38,29.88 D5.2 | 8.62,29.88 L5.1
N$25
  Top 0.15: J1.4 11.12,21.75 11.38,22 11.88,22 EPD_C2.2
N$26
  Top 0.15: J1.5 11.12,21.25 11.75,20.62 EPD_C1.2
N$27
  Top 0.15: J4.B5 21.25,28.12 R2_USB.1
N$28
  Top 0.15: J1.19 11.12,14.25 11.38,14 11.38,13.62 11.88,13.12 12.38,13.12 EPD_C7.2
N$30
  Top 0.15: J1.24 10.62,11.38 11.75,10.25 13,10.25 13.5,9.75 13.5,9 11.38,6.88 7.88,6.88 EPD_C12.2
N$31
  Top 0.15: J1.18 11,14.75 12.25,16 13.5,16 EPD_C6.2
N$32  (via drill 0.15)
  Top 0.15: v11.38,12 12.25,12 EPD_C8.2 | v9.88,13.5 10.12,13.75 J1.20
  Route15 0.15: v9.88,13.5 v11.38,12
N$34
  Top 0.15: J1.22 9.75,12.75 9,12 9,11.75 11,9.75 11.62,9.75 EPD_C10.2
N$36
  Top 0.15: J4.A5 24.25,28.25 26,26.5 26.88,26.5 R1_USB.2
OUT+  (via drill 0.15)
  Top 0.15: v30.5,2.62 30.5,2.5 TP_OP.TP | v31.38,7.1 31.34,7.07 IC2.A3
  Route15 0.15: v31.38,7.1 31.38,6.74 30.5,5.87 v30.5,2.62
OUT-
  Top 0.15: TP_ON.TP 37.12,7 35.88,5.75 31.25,5.75 31,6 IC2.C3
P0.13  (via drill 0.15)
  Top 0.15: v30.38,16.62 30,16.62 U1.P$AD8 | R5.1 v27.5,6.38 29.12,4.75 29.12,4.62 | 29.12,4.62 29.12,3.88 C30.2 | 29.12,4.62 29.75,4 32.5,4 SW_UP.2
  Route15 0.15: v30.38,16.62 30.38,16 27.5,13.12 27.5,10.87 27.5,10.3 27.37,10.17 27.37,6.5 v27.5,6.38
P0.14  (via drill 0.15)
  Top 0.15: R8.1 25.88,8.12 v25.5,7.75 22.75,5 22,5 21.5,4.5 21.5,4 SW_ENT.2 | v29.5,16.38 29.5,16.88 U1.P$AC9 | v23.12,11.25 23.5,10.88 C31.2
  Route15 0.15: v25.5,7.75 25.5,8.88 v23.12,11.25
  Bottom 0.15: v29.5,16.38 29.5,15.75 27,13.25 25.12,13.25 v23.12,11.25
P1.01  (via drill 0.15)
  Top 0.15: v29.95,21.18 29.41,20.64 28.7,20.64 U1.P$Y23 | Q1.1 14.75,23.25 v15.12,22.88 15.25,22.75 15.62,23.12 R_PWR_EPD.1
  Bottom 0.15: v29.95,21.18 16.82,21.18 v15.12,22.88
P1.02  (via drill 0.15)
  Top 0.15: 13.12,7 13.38,6.75 C29.2 | 13.12,7 13,7 10.5,4.5 10.5,4 SW_DN.2 | v28.75,21.62 28.38,21.25 U1.P$W24 | v22.88,6.12 23.25,6.5 R7.1 | v14.62,8.5 13.12,7
  Route15 0.15: v14.62,8.5 15.25,8.5 15.62,8.12 16.75,8.12 17.75,7.12 17.75,6.38 19.12,5 21.75,5 v22.88,6.12
  Bottom 0.15: v28.75,21.62 30.02,21.62 30.75,20.89 30.75,16.5 27.12,12.88 25.5,12.88 22.88,10.25 v22.88,6.12
PMIC_INT  (via drill 0.15)
  Top 0.15: v28.12,15.12 27.77,15.12 U1.P$T2 | v34.25,11.62 34.38,11.62 IC1.A1
  Route15 0.15: v28.12,15.12 28.12,14.15 27.22,13.25 27.22,10.76 27.23,10.75 27.23,10.42 27.1,10.29 27.1,6.15 27.38,5.88 29.04,5.88 33.38,10.21 33.38,10.75 v34.25,11.62
PREVGH  (via drill 0.15)
  Top 0.15: 11.25,13.12 11.12,13.25 J1.21 | 11.25,13.12 11.75,12.62 12.5,12.62 12.75,12.38 12.75,11.5 12.25,11 12.25,10.88 EPD_C9.2 | v5.38,29.88 2.88,29.88 D5.1 | 11.25,13.12 v11.38,13.12
  Route15 0.15: v5.38,29.88 7.62,29.88 10.88,26.62 10.88,13.62 v11.38,13.12
PREVGL  (via drill 0.15)
  Top 0.15: 7.62,14.38 7.62,17.75 8.5,18.62 D2.2 | 7.62,14.38 7.62,12.62 10.12,10.12 10.12,8 EPD_C11.2 | v9.88,12.25 J1.23 | 7.62,14.38 v7.75,14.38
  Route15 0.15: v7.75,14.38 v9.88,12.25
RESE  (via drill 0.15)
  Top 0.15: R1_EP_DR.2 12.12,23.75 10.12,23.75 9.88,23.5 | 9.88,23.5 9.88,22.5 10.12,22.25 J1.3 | v8.62,24.75 7.38,26 6,26 Q3.2 | 9.88,23.5 v9.75,23.62
  Route15 0.15: v9.75,23.62 v8.62,24.75
RESET  (via drill 0.15)
  Top 0.15: J2.6 18.12,10.5 18.62,11 18.62,13.38 TP_RESET.TP v20.26,13.48
  Top 0.152: v29.42,17.9 U1.P$AC13
  Route15 0.15: v29.37,20.29 29.29,20.37 25.45,20.37 25.22,20.6 25.22,21.69 24.86,22.05 24.15,22.05 23.88,21.78 23.88,20.93 23.31,20.36 21.64,20.36 v21.25,20.36 | v19.93,16.23 20.26,15.9 v20.26,13.48
  Bottom 0.15: v29.42,17.9 29.42,20.24 v29.37,20.29 | v21.25,20.36 21.25,18.88 20.22,17.85 19.93,17.56 v19.93,16.23
SCK
  Top 0.15: J1.13 11.12,17.25 11.5,17.62 23.38,17.62 U1.P$A12
SCL  (via drill 0.15)
  Top 0.15: IC1.B1 33.75,11 32,9.25 32,8.62 31.5,8.12 29.88,8.12 | 29.88,8.12 28.75,7 28.75,6.47 29.35,5.88 29.88,5.88 30,6 IC2.C1 | v25.75,12.12 25.75,11.75 IC3.12 | 29.88,8.12 v29.88,8.25 | v41.5,24.38 R17.2 | v34.62,26.38 R4.1 33.38,26.38 32,25 TP_SCL.TP 32,24.88 31.25,24.88 30.78,24.41 29.51,24.41 29.5,24.39 U3.7
  Top 0.152: U1.P$M2 v26.67,15.11
  Route15 0.15: v34.62,26.38 40.38,26.38 41.5,25.25 v41.5,24.38
  Route15 0.152: v26.67,15.11 26.67,14.61 26.56,14.5 26.56,14.11 26.67,14 26.76,13.91 26.76,13.77 26.76,13.59 26.66,13.49 26.66,13.29 26.66,13.26 25.98,12.58 25.75,12.35 v25.75,12.12
  Bottom 0.15: v41.5,24.38 41.5,17.75 32,8.25 v29.88,8.25 29.69,8.25 26.98,10.96 26.91,10.96 v25.75,12.12
SDA  (via drill 0.15)
  Top 0.15: 40,27.38 38.75,26.12 38.75,25.5 TP_SDA.TP | R18.2 43.75,25.5 43.75,26 41.97,27.78 40.4,27.78 40,27.38 | v30.88,22.5 30.88,20.88 R2.1 | U3.8 28.62,25 v28.62,25.38 28.62,25.5 31.38,28.25 32.88,28.25 34.5,29.88 37.5,29.88 40,27.38 | v26.38,13.75 26.38,14.62 U1.P$L1 | v24.75,11.25 24.88,11.12 25.25,11.12 IC3.2 | v33.88,10.62 34.62,10.62 IC1.C1 | IC2.B2
  Route15 0.15: v26.38,13.75 26.38,13.38 24.75,11.75 v24.75,11.25 | v30.88,22.5 30.88,20.88 39.62,12.12 39.62,11.88 38,10.25 34.25,10.25 34.1,10.4 | v33.88,10.62 34.1,10.4 | IC2.B2 30.42,6.72 34.1,10.4
  Bottom 0.15: v33.88,10.62 33.5,11 33.5,11.12 31.95,12.68 30.74,12.68 30.57,12.5 25.62,12.5 24.75,11.62 v24.75,11.25 | v28.62,25.38 29.69,24.31 30.3,24.31 30.88,23.73 v30.88,22.5
  other vias: 30.42,6.57
SWDCLK  (via drill 0.15)
  Top 0.15: 30.38,22.75 30.5,22.88 33.25,22.88 33.62,23.25 34.38,23.25 34.62,23 34.62,22.12 34.88,21.88 34.88,20.5 33.12,18.75 TP_SWDCLK.TP | 30.38,22.75 28.88,21.25 U1.P$AA24 | v13.88,9.75 15.5,8.12 17,8.12 18,9.12 J2.4 | 30.38,22.75 v30.25,22.75
  Bottom 0.15: v13.88,9.75 12.5,11.12 12.5,21.25 15,23.75 25.38,23.75 25.73,24.1 28.36,24.1 29.35,23.12 29.88,23.12 v30.25,22.75
SWDIO  (via drill 0.15)
  Top 0.15: v30.38,22.25 29.38,21.25 U1.P$AC24 | v18.5,8.38 18.12,8 J2.2 18.12,7.88 17.75,7.5 17.75,6.5 17.88,6.38 17.88,3 TP_SWDIO.TP
  Bottom 0.15: v30.38,22.25 30.25,22.25 29.66,22.84 29.23,22.84 28.72,23.35 15.1,23.35 14.38,22.62 14.38,13.75 18.5,9.62 v18.5,8.38
SWO
  Top 0.15: U1.P$AD22 30,20.12 30.25,20.12 30.62,19.75 32,19.75 33.25,21 TP_SWO.TP
VBAT  (via drill 0.15)
  Top 0.15: 30.5,29.62 32.88,29.62 33.12,29.38 33.12,29.25 C37.2 | 30.5,29.62 30.12,30 TP_VBAT.TP 30.5,29.62 | v35.5,10.75 35.38,10.62 35,10.62 IC1.C2 | v25.88,23.75 26.38,23.75 26.5,23.88 U3.3 26.62,24 26.62,24.38 U3.2 | v32.38,27.25 32.12,27.5 C27.2 | 30.5,29.62 29.62,28.75 29.62,27 v28.12,25.5
  Route15 0.15: v35.5,10.75 35.5,12.12 35.5,12.53 31.01,17.02 30.1,17.02 29.94,17.18 29.94,17.97 29.77,18.14 29.77,18.34 29.77,20.43 29.27,20.92 28.88,20.92 28.7,20.92 v25.88,23.75 26.38,23.75 v28.12,25.5 29.25,26.62 31.12,26.62 31.75,27.25 v32.38,27.25
VBUS  (via drill 0.15)
  Top 0.15: C21.1 18,24.12 18,25.62 C43.1 18,25.75 18,26.25 19.5,27.75 | 19.5,27.75 19.62,27.88 19.86,27.88 20.62,28.64 20.62,28.88 J4.A9_B4 20.62,29 20.62,29.38 21.62,30.38 24.38,30.38 25.38,29.38 25.38,29 J4.A4_B9 25.38,28.88 25.38,28.25 26,27.62 27.62,27.62 | 19.5,27.75 21.25,26 21.25,25.62 21.5,25.38 22.25,25.38 D3.5 | v30.62,15.12 30,15.12 U1.P$AD2 | v35,11.88 35.12,11.75 35.12,11.5 35,11.38 IC1.A2 | 27.62,27.62 27.75,27.62 | 27.75,27.62 27.88,27.62 28.12,27.38 C42.1 | C38.2 33.75,33.5 33.5,33.75 29.75,33.75 29,33 29,30.75 28.38,30.12 28.38,28.38 27.62,27.62 | 27.75,27.62 v27.75,27.5
  Route15 0.15: v30.62,15.12 31.75,15.12 v35,11.88
  Bottom 0.15: v30.62,15.12 30.62,15.38 32.62,17.38 32.62,22.77 30.53,24.86 30.39,24.86 v27.75,27.5
VREG
  Top 0.15: IC1.B2 35.25,11 35.38,11.12 36,11.12 36.25,10.88 37.38,10.88 38,11.5 38,14.12 37.5,14.62 | 37.5,14.62 36.88,15.25 C23.2 | 37.5,14.62 36.25,14.62 34.38,16.5 34.38,17.25 C24.2 34.38,17.38 34.38,18.25 37.25,21.12 IC9.A1 37.38,21.25 37.38,21.62 | 37.38,21.62 37.38,22 IC9.A3 37.25,22 36.5,22.75 36.5,24.88 36.12,25.25 TP_VREG.TP 36.12,25.38 36.12,29 C39.1 | 37.38,21.62 IC9.A2